# EAGLE board TelemetryECU rev1 Panel (EAGLE 9.5.0), part 1 of 3
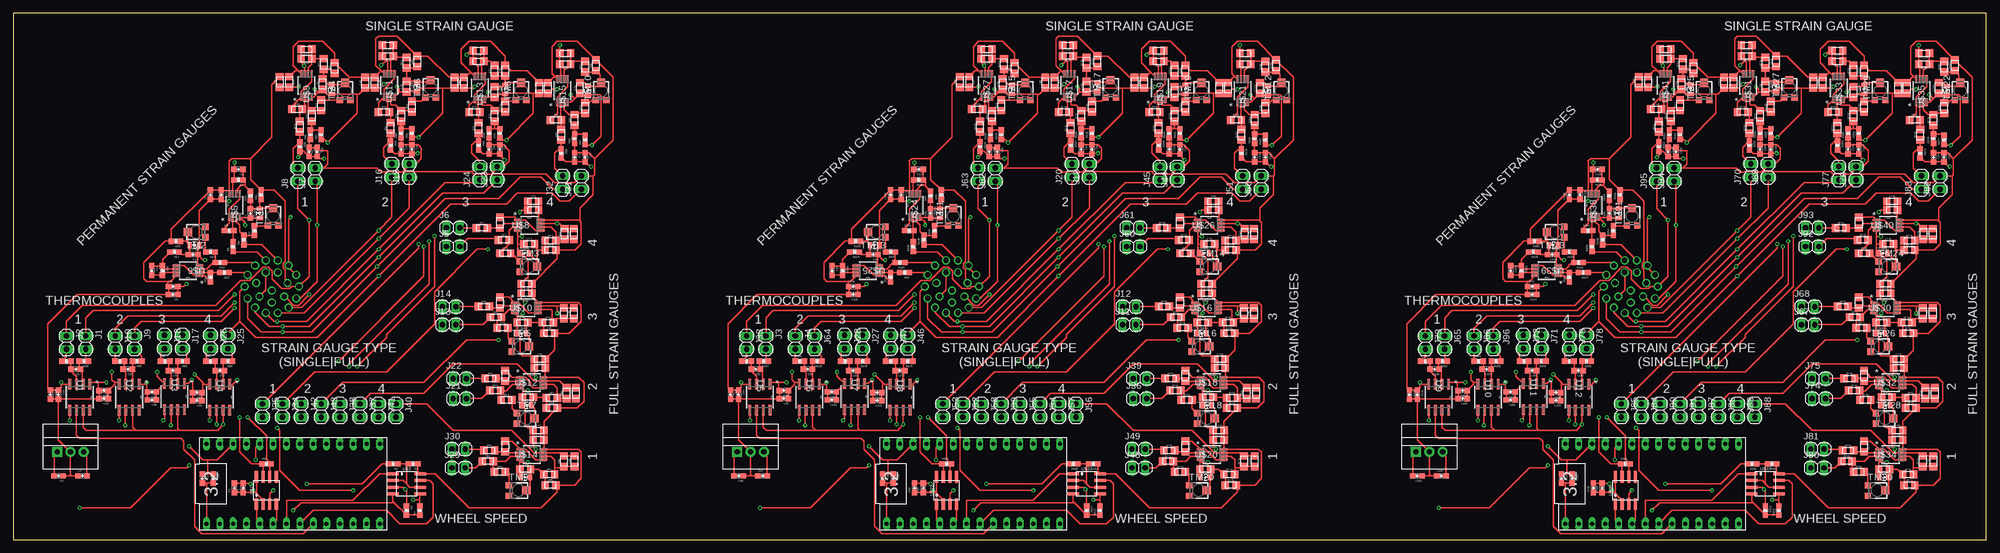
[diagram p0: board, top side]
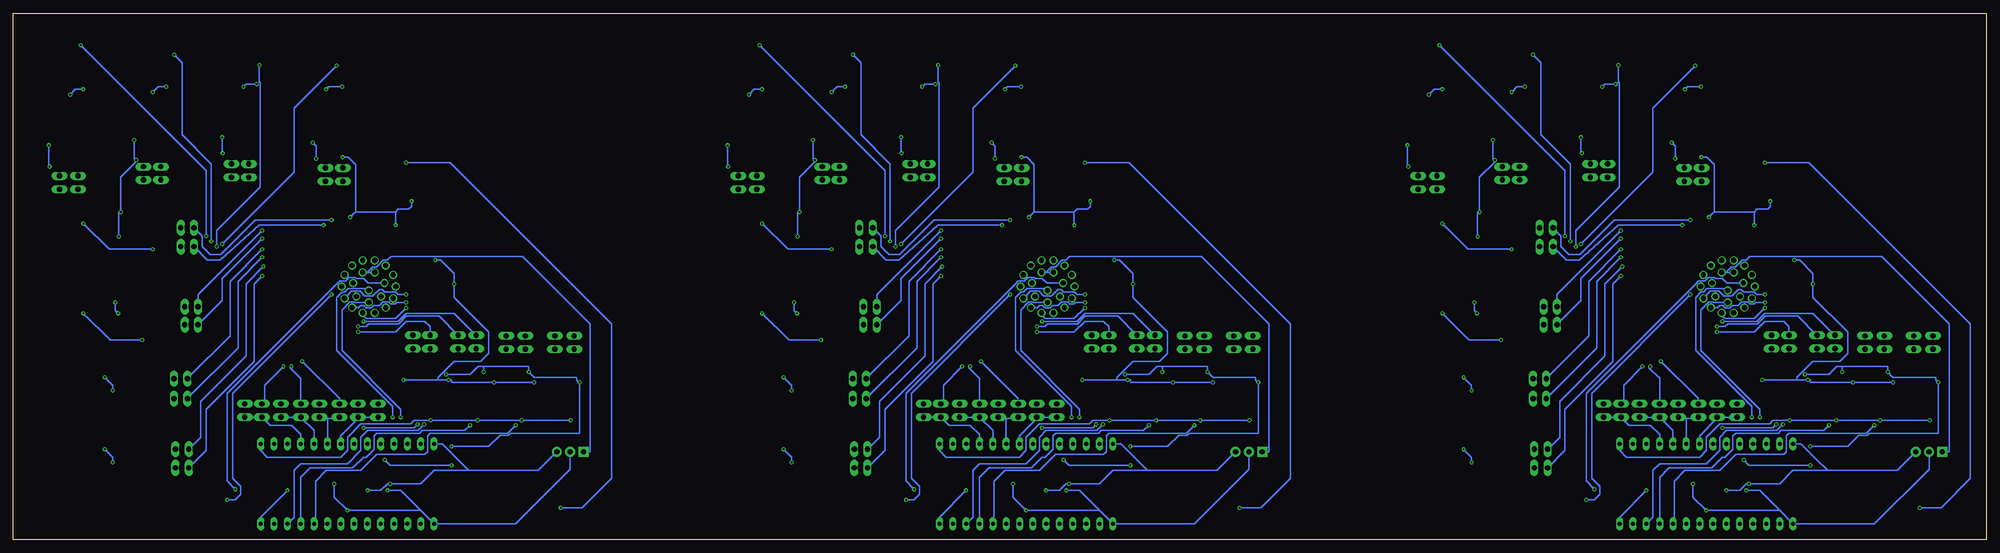
[diagram p1: board, bottom side, seen from below]

Size 375.84 x 100.38 mm. Coordinates in mm from the lower left corner, seen from the top.
Outline: 0,0 375.84,0 375.84,100.38 0,100.38 0,0
Copper layers (1*16): Top 0.035mm / dielectric 1.5mm / Bottom 0.035mm
Design rules "default": minimum track width 6mil, minimum drill 0.35mm, track to track 6mil, track to pad 6mil, pad to pad 6mil, via to via 6mil, smd to smd 6mil, copper to edge 40mil, drill to drill 6mil, minimum pad ring 10mil, minimum via ring 8mil, stop-mask expansion 4mil, vias tented up to drill 0mil, thermal gap 10mil

## Footprints (pad centres in the part's own frame; a part is rotated, then mirrored left to right if it is on the bottom)
0603-CAP = smd 1.1 x 1: 1 -0.85,0; 2 0.85,0
0805 = smd 1.4 x 1.5: 1 -1.025,0; 2 1.025,0
1X02 = drill 1.016 long: 1 -1.27,0; 2 1.27,0
0805_D = smd 0.8 x 1.2: A -0.9,0; C 0.9,0
0603-RES = smd 1.1 x 1: 1 -0.85,0; 2 0.85,0
OKI-78SR = drill 1 pad 1.88 square: 1 -2.54,0 | drill 1 pad 1.88: 2 0,0; 3 2.54,0
TC33X = smd 1.2 x 1.2: 1 -1,-1.825; 3 1,-1.825 | smd 1.5 x 1.6: 2 0,1.5
21-0041B_8 = smd 1.981 x 0.533: 1 -2.464,1.905; 2 -2.464,0.635; 3 -2.464,-0.635; 4 -2.464,-1.905; 5 2.464,-1.905; 6 2.464,-0.635; 7 2.464,0.635; 8 2.464,1.905
TEENSY_3.2_SIMPLE = drill 0.8 long: 3.3V 16.51,29.21; A0 16.51,3.81; A1 16.51,6.35; A2 16.51,8.89; A3 16.51,11.43; A4 16.51,13.97; A5 16.51,16.51; A6 16.51,19.05; A7 16.51,21.59; A8 16.51,24.13; A9 16.51,26.67; AGND 16.51,31.75; D0(RX1) 1.27,31.75; D1(TX1) 1.27,29.21; D2 1.27,26.67; D3(CANTX) 1.27,24.13; D4(CANRX) 1.27,21.59; D5 1.27,19.05; D6 1.27,16.51; D7(RX3) 1.27,13.97; D8(TX3) 1.27,11.43; D9(RX2) 1.27,8.89; D10(TX2) 1.27,6.35; D11 1.27,3.81; D12 1.27,1.27; D13 16.51,1.27; GND 1.27,34.29; VIN 16.51,34.29
SOIC-08 = smd 0.6 x 2.2: 1 -1.905,-2.6; 2 -0.635,-2.6; 3 0.635,-2.6; 4 1.905,-2.6; 5 1.905,2.6; 6 0.635,2.6; 7 -0.635,2.6; 8 -1.905,2.6
AUTOSPORT_12-35 = drill 1: P$1 1.143,5.004; P$2 3.2,4.013; P$3 4.623,2.235; P$4 5.156,0; P$5 4.623,-2.235; P$6 3.2,-4.013; P$7 1.143,-5.004; P$8 -1.143,-5.004; P$9 -3.2,-4.013; P$10 -4.623,-2.235; P$11 -5.156,0; P$12 -3.2,4.013; P$13 -1.143,5.004; P$14 1.143,2.718; P$15 2.972,0.66; P$16 2.362,-1.905; P$17 -2.362,-1.905; P$18 -2.972,0.66; P$19 -1.143,2.718; P$20 0,-0.762; P$21 0,-3.048; P$22 -4.623,2.235
MSOP-8_MS = smd 1.397 x 0.432: 1 -2.21,0.975; 2 -2.21,0.325; 3 -2.21,-0.325; 4 -2.21,-0.975; 5 2.21,-0.975; 6 2.21,-0.325; 7 2.21,0.325; 8 2.21,0.975

## Placement (x,y rotation side)
C1  1 uF  [0603-CAP]  43.81,9.91 90 top
C2  .1 uF  [0603-CAP]  42.16,9.91 90 top
C3  10uF  [0603-CAP]  8.64,12.19 180 top
C4  10uF  [0603-CAP]  13.21,12.19 0 top
C5  0.1uF  [0603-CAP]  30.48,46.74 180 top
C6  0.01uF  [0603-CAP]  42.93,70.61 180 top
C7  0.1uF  [0603-CAP]  45.21,62.23 90 top
C8  1uF  [0603-CAP]  30.48,48.26 0 top
C9  0.1uF  [0603-CAP]  37.59,65.79 90 top
C10  0.01uF  [0603-CAP]  26.42,51.31 270 top
C11  0.1uF  [0603-CAP]  34.29,54.36 180 top
C12  1uF  [0603-CAP]  39.62,65.79 270 top
C13  1uF  [0603-CAP]  38.1,11.68 270 top
C14  .1uF  [0603-CAP]  36.07,11.68 270 top
C15  1 uF  [0603-CAP]  173.35,9.91 90 top
C16  0.01uF  [0603-CAP]  155.96,51.31 270 top
C17  10nF  [0603-CAP]  11.94,32.51 180 top
C18  0.1uF  [0603-CAP]  7.11,27.69 270 top
C19  1uF  [0603-CAP]  8.64,27.69 270 top
C20  0.1uF  [0603-CAP]  163.83,54.36 180 top
C21  1uF  [0603-CAP]  169.16,65.79 270 top
C22  0.1uF  [0805]  99.06,62.87 0 top
C23  0.01uF  [0805]  106.81,58.29 90 top
C24  0.1uF  [0805]  98.3,56.39 0 top
C25  1uF  [0805]  99.06,64.52 0 top
C26  0.1uF  [0603-CAP]  57.91,73.91 270 top
C27  1uF  [0603-CAP]  56.39,73.91 270 top
C28  0.1uF  [0805]  50.8,87.25 90 top
C29  0.01uF  [0805]  55.88,93.47 180 top
C30  0.1uF  [0805]  58.93,86.87 90 top
C31  1uF  [0805]  52.58,87.25 270 top
C32  10nF  [0603-CAP]  21.84,32.51 180 top
C33  0.1uF  [0603-CAP]  17.27,28.45 180 top
C34  1uF  [0603-CAP]  17.27,26.92 180 top
C35  1uF  [0603-CAP]  167.64,11.68 270 top
C36  .1uF  [0603-CAP]  165.61,11.68 270 top
C37  0.1uF  [0805]  97.79,48.77 0 top
C38  0.01uF  [0805]  106.81,43.18 90 top
C39  0.1uF  [0805]  97.03,41.4 0 top
C40  1uF  [0805]  97.79,46.99 0 top
C41  0.1uF  [0603-CAP]  75.95,74.42 270 top
C42  1uF  [0603-CAP]  73.91,74.42 270 top
C43  0.1uF  [0805]  67.06,87.12 90 top
C44  0.01uF  [0805]  71.37,94.23 180 top
C45  0.1uF  [0805]  74.93,86.36 90 top
C46  1uF  [0805]  68.83,87.12 270 top
C47  10nF  [0603-CAP]  30.48,32.26 180 top
C48  0.1uF  [0603-CAP]  26.42,26.67 180 top
C49  1uF  [0603-CAP]  26.42,28.19 180 top
C50  10nF  [0603-CAP]  141.48,32.51 180 top
C51  0.1uF  [0603-CAP]  136.65,27.69 270 top
C52  0.1uF  [0805]  100.33,34.42 0 top
C53  0.01uF  [0805]  107.19,27.94 90 top
C54  0.1uF  [0805]  98.04,27.18 0 top
C55  1uF  [0805]  100.33,32.77 0 top
C56  0.1uF  [0603-CAP]  90.68,74.42 270 top
C57  1uF  [0603-CAP]  92.71,74.42 270 top
C58  0.1uF  [0805]  85.85,87.12 90 top
C59  0.01uF  [0805]  88.65,93.22 180 top
C60  0.1uF  [0805]  91.69,85.34 90 top
C61  1uF  [0805]  84.07,87.12 270 top
C62  10nF  [0603-CAP]  39.37,32.26 180 top
C63  0.1uF  [0603-CAP]  35.05,26.54 180 top
C64  1uF  [0603-CAP]  35.05,28.07 180 top
C65  1uF  [0603-CAP]  138.18,27.69 270 top
C66  .1 uF  [0603-CAP]  171.7,9.91 90 top
C67  0.1uF  [0805]  100.08,20.83 0 top
C68  0.01uF  [0805]  106.93,14.99 90 top
C69  0.1uF  [0805]  97.54,13.46 0 top
C70  1uF  [0805]  100.08,19.05 0 top
C71  0.1uF  [0603-CAP]  108.97,72.9 270 top
C72  1uF  [0603-CAP]  106.93,72.9 270 top
C73  0.1uF  [0805]  101.85,86.11 90 top
C74  0.01uF  [0805]  105.16,92.71 180 top
C75  0.1uF  [0805]  107.95,86.11 90 top
C76  1uF  [0805]  100.2,86.11 270 top
C77  0.1uF  [0805]  228.6,62.87 0 top
C78  0.01uF  [0805]  236.35,58.29 90 top
C79  0.1uF  [0805]  227.84,56.39 0 top
C80  1uF  [0805]  228.6,64.52 0 top
C81  0.1uF  [0603-CAP]  187.45,73.91 270 top
C82  1uF  [0603-CAP]  185.93,73.91 270 top
C83  0.1uF  [0805]  180.34,87.25 90 top
C84  0.01uF  [0805]  185.42,93.47 180 top
C85  10uF  [0603-CAP]  138.18,12.19 180 top
C86  0.1uF  [0805]  188.47,86.87 90 top
C87  1uF  [0805]  182.12,87.25 270 top
C88  10nF  [0603-CAP]  151.38,32.51 180 top
C89  0.1uF  [0603-CAP]  146.81,28.45 180 top
C90  1uF  [0603-CAP]  146.81,26.92 180 top
C91  0.1uF  [0805]  227.33,48.77 0 top
C92  0.01uF  [0805]  236.35,43.18 90 top
C93  0.1uF  [0805]  226.57,41.4 0 top
C94  10uF  [0603-CAP]  142.75,12.19 0 top
C95  1uF  [0805]  227.33,46.99 0 top
C96  0.1uF  [0603-CAP]  205.49,74.42 270 top
C97  1uF  [0603-CAP]  203.45,74.42 270 top
C98  0.1uF  [0805]  196.6,87.12 90 top
C99  0.01uF  [0805]  200.91,94.23 180 top
C100  0.1uF  [0805]  204.47,86.36 90 top
C101  1uF  [0805]  198.37,87.12 270 top
C102  10nF  [0603-CAP]  160.02,32.26 180 top
C103  0.1uF  [0603-CAP]  155.96,26.67 180 top
C104  1uF  [0603-CAP]  155.96,28.19 180 top
C105  0.1uF  [0603-CAP]  160.02,46.74 180 top
C106  0.1uF  [0805]  229.87,34.42 0 top
C107  0.01uF  [0805]  236.73,27.94 90 top
C108  0.1uF  [0805]  227.58,27.18 0 top
C109  1uF  [0805]  229.87,32.77 0 top
C110  0.1uF  [0603-CAP]  220.22,74.42 270 top
C111  1uF  [0603-CAP]  222.25,74.42 270 top
C112  0.1uF  [0805]  215.39,87.12 90 top
C113  0.01uF  [0805]  218.19,93.22 180 top
C114  0.01uF  [0603-CAP]  172.47,70.61 180 top
C115  0.1uF  [0805]  221.23,85.34 90 top
C116  1uF  [0805]  213.61,87.12 270 top
C117  10nF  [0603-CAP]  168.91,32.26 180 top
C118  0.1uF  [0603-CAP]  164.59,26.54 180 top
C119  1uF  [0603-CAP]  164.59,28.07 180 top
C120  0.1uF  [0805]  229.62,20.83 0 top
C121  0.01uF  [0805]  236.47,14.99 90 top
C122  0.1uF  [0805]  227.08,13.46 0 top
C123  0.1uF  [0603-CAP]  174.75,62.23 90 top
C124  1uF  [0805]  229.62,19.05 0 top
C125  0.1uF  [0603-CAP]  238.51,72.9 270 top
C126  1uF  [0603-CAP]  236.47,72.9 270 top
C127  0.1uF  [0805]  231.39,86.11 90 top
C128  0.01uF  [0805]  234.7,92.71 180 top
C129  0.1uF  [0805]  237.49,86.11 90 top
C130  1uF  [0805]  229.74,86.11 270 top
C131  1uF  [0603-CAP]  160.02,48.26 0 top
C132  0.1uF  [0603-CAP]  167.13,65.79 90 top
C133  1 uF  [0603-CAP]  302.64,9.91 90 top
C134  0.01uF  [0603-CAP]  285.24,51.31 270 top
C135  0.1uF  [0603-CAP]  293.12,54.36 180 top
C136  1uF  [0603-CAP]  298.45,65.79 270 top
C137  1uF  [0603-CAP]  296.93,11.68 270 top
C138  .1uF  [0603-CAP]  294.89,11.68 270 top
C139  10nF  [0603-CAP]  270.76,32.51 180 top
C140  0.1uF  [0603-CAP]  265.94,27.69 270 top
C141  1uF  [0603-CAP]  267.46,27.69 270 top
C142  .1 uF  [0603-CAP]  300.99,9.91 90 top
C143  0.1uF  [0805]  357.89,62.87 0 top
C144  0.01uF  [0805]  365.63,58.29 90 top
C145  0.1uF  [0805]  357.12,56.39 0 top
C146  1uF  [0805]  357.89,64.52 0 top
C147  0.1uF  [0603-CAP]  316.74,73.91 270 top
C148  1uF  [0603-CAP]  315.21,73.91 270 top
C149  0.1uF  [0805]  309.63,87.25 90 top
C150  0.01uF  [0805]  314.71,93.47 180 top
C151  10uF  [0603-CAP]  267.46,12.19 180 top
C152  0.1uF  [0805]  317.75,86.87 90 top
C153  1uF  [0805]  311.4,87.25 270 top
C154  10nF  [0603-CAP]  280.67,32.51 180 top
C155  0.1uF  [0603-CAP]  276.1,28.45 180 top
C156  1uF  [0603-CAP]  276.1,26.92 180 top
C157  0.1uF  [0805]  356.62,48.77 0 top
C158  0.01uF  [0805]  365.63,43.18 90 top
C159  0.1uF  [0805]  355.85,41.4 0 top
C160  10uF  [0603-CAP]  272.03,12.19 0 top
C161  1uF  [0805]  356.62,46.99 0 top
C162  0.1uF  [0603-CAP]  334.77,74.42 270 top
C163  1uF  [0603-CAP]  332.74,74.42 270 top
C164  0.1uF  [0805]  325.88,87.12 90 top
C165  0.01uF  [0805]  330.2,94.23 180 top
C166  0.1uF  [0805]  333.76,86.36 90 top
C167  1uF  [0805]  327.66,87.12 270 top
C168  10nF  [0603-CAP]  289.31,32.26 180 top
C169  0.1uF  [0603-CAP]  285.24,26.67 180 top
C170  1uF  [0603-CAP]  285.24,28.19 180 top
C171  0.1uF  [0603-CAP]  289.31,46.74 180 top
C172  0.1uF  [0805]  359.16,34.42 0 top
C173  0.01uF  [0805]  366.01,27.94 90 top
C174  0.1uF  [0805]  356.87,27.18 0 top
C175  1uF  [0805]  359.16,32.77 0 top
C176  0.1uF  [0603-CAP]  349.5,74.42 270 top
C177  1uF  [0603-CAP]  351.54,74.42 270 top
C178  0.1uF  [0805]  344.68,87.12 90 top
C179  0.01uF  [0805]  347.47,93.22 180 top
C180  0.01uF  [0603-CAP]  301.75,70.61 180 top
C181  0.1uF  [0805]  350.52,85.34 90 top
C182  1uF  [0805]  342.9,87.12 270 top
C183  10nF  [0603-CAP]  298.2,32.26 180 top
C184  0.1uF  [0603-CAP]  293.88,26.54 180 top
C185  1uF  [0603-CAP]  293.88,28.07 180 top
C186  0.1uF  [0805]  358.9,20.83 0 top
C187  0.01uF  [0805]  365.76,14.99 90 top
C188  0.1uF  [0805]  356.36,13.46 0 top
C189  0.1uF  [0603-CAP]  304.04,62.23 90 top
C190  1uF  [0805]  358.9,19.05 0 top
C191  0.1uF  [0603-CAP]  367.79,72.9 270 top
C192  1uF  [0603-CAP]  365.76,72.9 270 top
C193  0.1uF  [0805]  360.68,86.11 90 top
C194  0.01uF  [0805]  363.98,92.71 180 top
C195  0.1uF  [0805]  366.78,86.11 90 top
C196  1uF  [0805]  359.03,86.11 270 top
C197  1uF  [0603-CAP]  289.31,48.26 0 top
C198  0.1uF  [0603-CAP]  296.42,65.79 90 top
J1  JUMPER.1  [1X02]  13.84,37.59 270 top
J2  JUMPER.1  [1X02]  10.16,37.59 270 top
J3  JUMPER.1  [1X02]  143.38,37.59 270 top
J4  JUMPER.1  [1X02]  148.97,37.59 270 top
J5  JUMPER.1  [1X02]  83.82,55.88 0 top
J6  JUMPER.1  [1X02]  83.82,59.44 0 top
J7  JUMPER.1  [1X02]  57.53,69.6 90 top
J8  JUMPER.1  [1X02]  54.23,69.6 90 top
J9  JUMPER.1  [1X02]  23.11,37.59 270 top
J10  JUMPER.1  [1X02]  19.43,37.59 270 top
J11  JUMPER.1  [1X02]  212.6,41.02 0 top
J12  JUMPER.1  [1X02]  212.6,44.45 0 top
J13  JUMPER.1  [1X02]  83.06,41.02 0 top
J14  JUMPER.1  [1X02]  83.06,44.45 0 top
J15  JUMPER.1  [1X02]  75.44,70.36 90 top
J16  JUMPER.1  [1X02]  72.14,70.36 90 top
J17  JUMPER.1  [1X02]  32.26,37.72 270 top
J18  JUMPER.1  [1X02]  28.83,37.72 270 top
J19  JUMPER.1  [1X02]  204.98,70.36 90 top
J20  JUMPER.1  [1X02]  201.68,70.36 90 top
J21  JUMPER.1  [1X02]  85.09,26.92 0 top
J22  JUMPER.1  [1X02]  85.09,30.73 0 top
J23  JUMPER.1  [1X02]  92.2,69.85 90 top
J24  JUMPER.1  [1X02]  88.9,69.85 90 top
J25  JUMPER.1  [1X02]  40.89,37.72 270 top
J26  JUMPER.1  [1X02]  37.59,37.72 270 top
J27  JUMPER.1  [1X02]  161.8,37.72 270 top
J28  JUMPER.1  [1X02]  158.37,37.72 270 top
J29  JUMPER.1  [1X02]  84.84,13.72 0 top
J30  JUMPER.1  [1X02]  84.84,17.27 0 top
J31  JUMPER.1  [1X02]  108.2,68.07 90 top
J32  JUMPER.1  [1X02]  104.65,68.07 90 top
J33  JUMPER.1  [1X02]  139.7,37.59 270 top
J34  JUMPER.1  [1X02]  51.31,24.64 270 top
J35  JUMPER.1  [1X02]  47.5,24.64 270 top
J36  JUMPER.1  [1X02]  214.63,26.92 0 top
J37  JUMPER.1  [1X02]  66.04,24.64 270 top
J38  JUMPER.1  [1X02]  62.23,24.64 270 top
J39  JUMPER.1  [1X02]  214.63,30.73 0 top
J40  JUMPER.1  [1X02]  72.9,24.64 270 top
J41  JUMPER.1  [1X02]  69.6,24.64 270 top
J42  JUMPER.1  [1X02]  54.86,24.64 270 top
J43  JUMPER.1  [1X02]  58.67,24.64 270 top
J44  JUMPER.1  [1X02]  221.74,69.85 90 top
J45  JUMPER.1  [1X02]  218.44,69.85 90 top
J46  JUMPER.1  [1X02]  170.43,37.72 270 top
J47  JUMPER.1  [1X02]  167.13,37.72 270 top
J48  JUMPER.1  [1X02]  214.38,13.72 0 top
J49  JUMPER.1  [1X02]  214.38,17.27 0 top
J50  JUMPER.1  [1X02]  237.74,68.07 90 top
J51  JUMPER.1  [1X02]  234.19,68.07 90 top
J52  JUMPER.1  [1X02]  180.85,24.64 270 top
J53  JUMPER.1  [1X02]  177.04,24.64 270 top
J54  JUMPER.1  [1X02]  195.58,24.64 270 top
J55  JUMPER.1  [1X02]  191.77,24.64 270 top
J56  JUMPER.1  [1X02]  202.44,24.64 270 top
J57  JUMPER.1  [1X02]  199.14,24.64 270 top
J58  JUMPER.1  [1X02]  184.4,24.64 270 top
J59  JUMPER.1  [1X02]  188.21,24.64 270 top
J60  JUMPER.1  [1X02]  213.36,55.88 0 top
J61  JUMPER.1  [1X02]  213.36,59.44 0 top
J62  JUMPER.1  [1X02]  187.07,69.6 90 top
J63  JUMPER.1  [1X02]  183.77,69.6 90 top
J64  JUMPER.1  [1X02]  152.65,37.59 270 top
J65  JUMPER.1  [1X02]  272.67,37.59 270 top
J66  JUMPER.1  [1X02]  278.26,37.59 270 top
J67  JUMPER.1  [1X02]  341.88,41.02 0 top
J68  JUMPER.1  [1X02]  341.88,44.45 0 top
J69  JUMPER.1  [1X02]  334.26,70.36 90 top
J70  JUMPER.1  [1X02]  330.96,70.36 90 top
J71  JUMPER.1  [1X02]  291.08,37.72 270 top
J72  JUMPER.1  [1X02]  287.65,37.72 270 top
J73  JUMPER.1  [1X02]  268.99,37.59 270 top
J74  JUMPER.1  [1X02]  343.92,26.92 0 top
J75  JUMPER.1  [1X02]  343.92,30.73 0 top
J76  JUMPER.1  [1X02]  351.03,69.85 90 top
J77  JUMPER.1  [1X02]  347.73,69.85 90 top
J78  JUMPER.1  [1X02]  299.72,37.72 270 top
J79  JUMPER.1  [1X02]  296.42,37.72 270 top
J80  JUMPER.1  [1X02]  343.66,13.72 0 top
J81  JUMPER.1  [1X02]  343.66,17.27 0 top
J82  JUMPER.1  [1X02]  367.03,68.07 90 top
J83  JUMPER.1  [1X02]  363.47,68.07 90 top
J84  JUMPER.1  [1X02]  310.13,24.64 270 top
J85  JUMPER.1  [1X02]  306.32,24.64 270 top
J86  JUMPER.1  [1X02]  324.87,24.64 270 top
J87  JUMPER.1  [1X02]  321.06,24.64 270 top
J88  JUMPER.1  [1X02]  331.72,24.64 270 top
J89  JUMPER.1  [1X02]  328.42,24.64 270 top
J90  JUMPER.1  [1X02]  313.69,24.64 270 top
J91  JUMPER.1  [1X02]  317.5,24.64 270 top
J92  JUMPER.1  [1X02]  342.65,55.88 0 top
J93  JUMPER.1  [1X02]  342.65,59.44 0 top
J94  JUMPER.1  [1X02]  316.36,69.6 90 top
J95  JUMPER.1  [1X02]  313.06,69.6 90 top
J96  JUMPER.1  [1X02]  281.94,37.59 270 top
LT1790B  1.25V  [0805_D]  46.99,62.23 90 top
LT1790B1  1.25V  [0805_D]  34.54,56.13 180 top
LT1790B2  1.25V  [0805_D]  97.28,54.61 0 top
LT1790B3  1.25V  [0805_D]  60.71,85.85 90 top
LT1790B4  1.25V  [0805_D]  96.77,39.37 0 top
LT1790B5  1.25V  [0805_D]  76.96,86.36 90 top
LT1790B6  1.25V  [0805_D]  97.79,25.65 0 top
LT1790B7  1.25V  [0805_D]  93.73,85.85 90 top
LT1790B8  1.25V  [0805_D]  97.54,11.94 0 top
LT1790B9  1.25V  [0805_D]  109.47,85.6 90 top
LT1790B10  1.25V  [0805_D]  176.53,62.23 90 top
LT1790B11  1.25V  [0805_D]  164.08,56.13 180 top
LT1790B12  1.25V  [0805_D]  226.82,54.61 0 top
LT1790B13  1.25V  [0805_D]  190.25,85.85 90 top
LT1790B14  1.25V  [0805_D]  226.31,39.37 0 top
LT1790B15  1.25V  [0805_D]  206.5,86.36 90 top
LT1790B16  1.25V  [0805_D]  227.33,25.65 0 top
LT1790B17  1.25V  [0805_D]  223.27,85.85 90 top
LT1790B18  1.25V  [0805_D]  227.08,11.94 0 top
LT1790B19  1.25V  [0805_D]  239.01,85.6 90 top
LT1790B20  1.25V  [0805_D]  305.82,62.23 90 top
LT1790B21  1.25V  [0805_D]  293.37,56.13 180 top
LT1790B22  1.25V  [0805_D]  356.11,54.61 0 top
LT1790B23  1.25V  [0805_D]  319.53,85.85 90 top
LT1790B24  1.25V  [0805_D]  355.6,39.37 0 top
LT1790B25  1.25V  [0805_D]  335.79,86.36 90 top
LT1790B26  1.25V  [0805_D]  356.62,25.65 0 top
LT1790B27  1.25V  [0805_D]  352.55,85.85 90 top
LT1790B28  1.25V  [0805_D]  356.36,11.94 0 top
LT1790B29  1.25V  [0805_D]  368.3,85.6 90 top
R1  1k  [0603-RES]  76.2,14.48 180 top
R2  1k  [0603-RES]  72.39,14.48 180 top
R3  150  [0603-RES]  74.93,5.59 270 top
R4  150  [0603-RES]  77.47,5.59 90 top
R5  10M  [0603-RES]  41.91,55.88 90 top
R6  10M  [0603-RES]  43.94,57.15 90 top
R7  9.76M  [0603-RES]  45.97,58.93 90 top
R8  10M  [0603-RES]  41.15,58.93 0 top
R9  100k  [0603-RES]  42.93,68.58 180 top
R10  100  [0603-RES]  45.21,65.53 90 top
R11  10k  [0603-RES]  47.24,65.79 90 top
R12  10M  [0603-RES]  40.26,50.93 180 top
R13  10M  [0603-RES]  39.37,52.83 180 top
R14  9.76M  [0603-RES]  37.59,54.86 180 top
R15  10M  [0603-RES]  37.59,50.04 90 top
R16  100k  [0603-RES]  28.45,51.31 270 top
R17  100  [0603-RES]  30.73,54.86 180 top
R18  10k  [0603-RES]  30.99,56.9 180 top
R19  1k  [0603-RES]  205.74,14.48 180 top
R20  0  [0603-RES]  13.46,34.04 180 top
R21  0  [0603-RES]  10.16,34.04 0 top
R22  10M  [0805]  89.28,59.44 0 top
R23  10M  [0805]  93.47,57.15 0 top
R24  9.76M  [0805]  93.73,54.61 0 top
R25  10M  [0805]  92.71,60.45 270 top
R26  100k  [0805]  105.03,58.29 90 top
R27  100  [0805]  102.36,57.02 0 top
R28  10k  [0805]  102.36,55.24 0 top
R29  10M  [0805]  54.61,78.74 90 top
R30  [0603-RES]  54.61,74.93 270 top
R31  [0603-RES]  56.64,77.22 90 top
R32  [0603-RES]  58.67,77.22 90 top
R33  10M  [0805]  56.9,80.77 90 top
R34  9.76M  [0805]  58.67,82.8 90 top
R35  10M  [0805]  54.1,82.04 0 top
R36  100k  [0805]  55.88,91.69 180 top
R37  100  [0805]  59.18,90.68 90 top
R38  10k  [0805]  61.21,89.92 90 top
R39  220  [0603-RES]  48.26,14.48 0 top
R40  0  [0603-RES]  23.62,34.04 180 top
R41  0  [0603-RES]  20.32,34.04 0 top
R42  10M  [0805]  89.66,44.45 0 top
R43  10M  [0805]  91.95,42.42 0 top
R44  9.76M  [0805]  93.22,40.39 0 top
R45  10M  [0805]  92.71,45.21 270 top
R46  100k  [0805]  104.9,43.18 90 top
R47  100  [0805]  101.85,41.4 0 top
R48  10k  [0805]  102.11,39.37 0 top
R49  [0603-RES]  71.88,75.18 270 top
R50  [0603-RES]  73.91,77.47 90 top
R51  [0603-RES]  75.95,77.47 90 top
R52  10M  [0805]  71.88,78.49 90 top
R53  10M  [0805]  73.91,80.77 90 top
R54  9.76M  [0805]  75.95,82.55 90 top
R55  10M  [0805]  70.61,81.53 0 top
R56  100k  [0805]  71.37,92.2 180 top
R57  100  [0805]  74.93,90.93 90 top
R58  10k  [0805]  76.96,91.19 90 top
R59  100  [0603-RES]  174.75,65.53 90 top
R60  0  [0603-RES]  32.26,34.04 180 top
R61  0  [0603-RES]  28.96,34.04 0 top
R62  10M  [0805]  90.93,30.73 0 top
R63  10M  [0805]  91.82,28.45 0 top
R64  9.76M  [0805]  93.98,26.67 0 top
R65  10M  [0805]  93.73,31.24 270 top
R66  100k  [0805]  105.41,27.94 90 top
R67  100  [0805]  102.62,27.05 0 top
R68  10k  [0805]  102.62,25.15 0 top
R69  [0603-RES]  88.65,75.18 270 top
R70  [0603-RES]  90.68,77.47 90 top
R71  [0603-RES]  92.71,77.47 90 top
R72  10M  [0805]  88.65,78.49 90 top
R73  10M  [0805]  91.69,80.77 90 top
R74  9.76M  [0805]  93.73,82.55 90 top
R75  10M  [0805]  87.88,81.53 0 top
R76  100k  [0805]  88.65,91.19 180 top
R77  100  [0805]  91.69,89.41 90 top
R78  10k  [0805]  93.73,89.41 90 top
R79  10k  [0603-RES]  176.78,65.79 90 top
R80  0  [0603-RES]  40.89,34.04 180 top
R81  0  [0603-RES]  37.59,34.04 0 top
R82  10M  [0805]  90.68,17.02 0 top
R83  10M  [0805]  90.42,14.99 0 top
R84  9.76M  [0805]  92.71,12.95 0 top
R85  10M  [0805]  93.73,17.78 270 top
R86  100k  [0805]  104.9,14.99 90 top
R87  100  [0805]  102.11,12.45 0 top
R88  10k  [0805]  102.36,10.41 0 top
R89  [0603-RES]  104.39,73.66 270 top
R90  [0603-RES]  106.93,76.45 90 top
R91  [0603-RES]  108.97,76.2 90 top
R92  10M  [0805]  104.39,77.22 90 top
R93  10M  [0805]  106.93,80.01 90 top
R94  9.76M  [0805]  108.97,82.3 90 top
R95  10M  [0805]  103.38,80.01 0 top
R96  100k  [0805]  105.16,90.68 180 top
R97  100  [0805]  108.97,90.17 90 top
R98  10k  [0805]  111,90.42 90 top
R99  10M  [0603-RES]  169.8,50.93 180 top
R100  10M  [0603-RES]  168.91,52.83 180 top
R101  9.76M  [0603-RES]  167.13,54.86 180 top
R102  10M  [0603-RES]  167.13,50.04 90 top
R103  100k  [0603-RES]  157.99,51.31 270 top
R104  100  [0603-RES]  160.27,54.86 180 top
R105  10k  [0603-RES]  160.53,56.9 180 top
R106  1k  [0603-RES]  201.93,14.48 180 top
R107  0  [0603-RES]  143,34.04 180 top
R108  0  [0603-RES]  139.7,34.04 0 top
R109  10M  [0805]  218.82,59.44 0 top
R110  10M  [0805]  223.01,57.15 0 top
R111  9.76M  [0805]  223.27,54.61 0 top
R112  10M  [0805]  222.25,60.45 270 top
R113  100k  [0805]  234.57,58.29 90 top
R114  100  [0805]  231.9,57.02 0 top
R115  10k  [0805]  231.9,55.24 0 top
R116  10M  [0805]  184.15,78.74 90 top
R117  150  [0603-RES]  204.47,5.59 270 top
R118  [0603-RES]  184.15,74.93 270 top
R119  [0603-RES]  186.18,77.22 90 top
R120  [0603-RES]  188.21,77.22 90 top
R121  10M  [0805]  186.44,80.77 90 top
R122  9.76M  [0805]  188.21,82.8 90 top
R123  10M  [0805]  183.64,82.04 0 top
R124  100k  [0805]  185.42,91.69 180 top
R125  100  [0805]  188.72,90.68 90 top
R126  10k  [0805]  190.75,89.92 90 top
R127  150  [0603-RES]  207.01,5.59 90 top
R128  0  [0603-RES]  153.16,34.04 180 top
R129  0  [0603-RES]  149.86,34.04 0 top
R130  10M  [0805]  219.2,44.45 0 top
R131  10M  [0805]  221.49,42.42 0 top
R132  9.76M  [0805]  222.76,40.39 0 top
R133  10M  [0805]  222.25,45.21 270 top
R134  100k  [0805]  234.44,43.18 90 top
R135  100  [0805]  231.39,41.4 0 top
R136  10k  [0805]  231.65,39.37 0 top
R137  [0603-RES]  201.42,75.18 270 top
R138  10M  [0603-RES]  171.45,55.88 90 top
R139  [0603-RES]  203.45,77.47 90 top
R140  [0603-RES]  205.49,77.47 90 top
R141  10M  [0805]  201.42,78.49 90 top
R142  10M  [0805]  203.45,80.77 90 top
R143  9.76M  [0805]  205.49,82.55 90 top
R144  10M  [0805]  200.15,81.53 0 top
R145  100k  [0805]  200.91,92.2 180 top
R146  100  [0805]  204.47,90.93 90 top
R147  10k  [0805]  206.5,91.19 90 top
R148  10M  [0603-RES]  173.48,57.15 90 top
R149  0  [0603-RES]  161.8,34.04 180 top
R150  0  [0603-RES]  158.5,34.04 0 top
R151  10M  [0805]  220.47,30.73 0 top
R152  10M  [0805]  221.36,28.45 0 top
R153  9.76M  [0805]  223.52,26.67 0 top
R154  10M  [0805]  223.27,31.24 270 top
R155  100k  [0805]  234.95,27.94 90 top
R156  100  [0805]  232.16,27.05 0 top
R157  10k  [0805]  232.16,25.15 0 top
R158  [0603-RES]  218.19,75.18 270 top
R159  9.76M  [0603-RES]  175.51,58.93 90 top
R160  [0603-RES]  220.22,77.47 90 top
R161  [0603-RES]  222.25,77.47 90 top
R162  10M  [0805]  218.19,78.49 90 top
R163  10M  [0805]  221.23,80.77 90 top
R164  9.76M  [0805]  223.27,82.55 90 top
R165  10M  [0805]  217.42,81.53 0 top
R166  100k  [0805]  218.19,91.19 180 top
R167  100  [0805]  221.23,89.41 90 top
R168  10k  [0805]  223.27,89.41 90 top
R169  10M  [0603-RES]  170.69,58.93 0 top
R170  0  [0603-RES]  170.43,34.04 180 top
R171  0  [0603-RES]  167.13,34.04 0 top
R172  10M  [0805]  220.22,17.02 0 top
R173  10M  [0805]  219.96,14.99 0 top
R174  9.76M  [0805]  222.25,12.95 0 top
R175  10M  [0805]  223.27,17.78 270 top
R176  100k  [0805]  234.44,14.99 90 top
R177  100  [0805]  231.65,12.45 0 top
R178  10k  [0805]  231.9,10.41 0 top
R179  [0603-RES]  233.93,73.66 270 top
R180  100k  [0603-RES]  172.47,68.58 180 top
R181  [0603-RES]  236.47,76.45 90 top
R182  [0603-RES]  238.51,76.2 90 top
R183  10M  [0805]  233.93,77.22 90 top
R184  10M  [0805]  236.47,80.01 90 top
R185  9.76M  [0805]  238.51,82.3 90 top
R186  10M  [0805]  232.92,80.01 0 top
R187  100k  [0805]  234.7,90.68 180 top
R188  100  [0805]  238.51,90.17 90 top
R189  10k  [0805]  240.54,90.42 90 top
R190  220  [0603-RES]  177.8,14.48 0 top
R191  1k  [0603-RES]  335.03,14.48 180 top
R192  100  [0603-RES]  304.04,65.53 90 top
R193  10k  [0603-RES]  306.07,65.79 90 top
R194  10M  [0603-RES]  299.08,50.93 180 top
R195  10M  [0603-RES]  298.2,52.83 180 top
R196  9.76M  [0603-RES]  296.42,54.86 180 top
R197  10M  [0603-RES]  296.42,50.04 90 top
R198  100k  [0603-RES]  287.27,51.31 270 top
R199  100  [0603-RES]  289.56,54.86 180 top
R200  10k  [0603-RES]  289.81,56.9 180 top
R201  1k  [0603-RES]  331.22,14.48 180 top
R202  0  [0603-RES]  272.29,34.04 180 top
R203  0  [0603-RES]  268.99,34.04 0 top
R204  10M  [0805]  348.11,59.44 0 top
R205  10M  [0805]  352.3,57.15 0 top
R206  9.76M  [0805]  352.55,54.61 0 top
R207  10M  [0805]  351.54,60.45 270 top
R208  100k  [0805]  363.86,58.29 90 top
R209  100  [0805]  361.19,57.02 0 top
R210  10k  [0805]  361.19,55.24 0 top
R211  10M  [0805]  313.44,78.74 90 top
R212  150  [0603-RES]  333.76,5.59 270 top
R213  [0603-RES]  313.44,74.93 270 top
R214  [0603-RES]  315.47,77.22 90 top
R215  [0603-RES]  317.5,77.22 90 top
R216  10M  [0805]  315.72,80.77 90 top
R217  9.76M  [0805]  317.5,82.8 90 top
R218  10M  [0805]  312.93,82.04 0 top
R219  100k  [0805]  314.71,91.69 180 top
R220  100  [0805]  318.01,90.68 90 top
R221  10k  [0805]  320.04,89.92 90 top
R222  150  [0603-RES]  336.3,5.59 90 top
R223  0  [0603-RES]  282.45,34.04 180 top
R224  0  [0603-RES]  279.15,34.04 0 top
R225  10M  [0805]  348.49,44.45 0 top
R226  10M  [0805]  350.77,42.42 0 top
R227  9.76M  [0805]  352.04,40.39 0 top
R228  10M  [0805]  351.54,45.21 270 top
R229  100k  [0805]  363.73,43.18 90 top
R230  100  [0805]  360.68,41.4 0 top
R231  10k  [0805]  360.93,39.37 0 top
R232  [0603-RES]  330.71,75.18 270 top
R233  10M  [0603-RES]  300.74,55.88 90 top
R234  [0603-RES]  332.74,77.47 90 top
R235  [0603-RES]  334.77,77.47 90 top
R236  10M  [0805]  330.71,78.49 90 top
R237  10M  [0805]  332.74,80.77 90 top
R238  9.76M  [0805]  334.77,82.55 90 top
R239  10M  [0805]  329.44,81.53 0 top
R240  100k  [0805]  330.2,92.2 180 top
R241  100  [0805]  333.76,90.93 90 top
R242  10k  [0805]  335.79,91.19 90 top
R243  10M  [0603-RES]  302.77,57.15 90 top
R244  0  [0603-RES]  291.08,34.04 180 top
R245  0  [0603-RES]  287.78,34.04 0 top
R246  10M  [0805]  349.76,30.73 0 top
R247  10M  [0805]  350.65,28.45 0 top
R248  9.76M  [0805]  352.81,26.67 0 top
R249  10M  [0805]  352.55,31.24 270 top
R250  100k  [0805]  364.24,27.94 90 top
R251  100  [0805]  361.44,27.05 0 top
R252  10k  [0805]  361.44,25.15 0 top
R253  [0603-RES]  347.47,75.18 270 top
R254  9.76M  [0603-RES]  304.8,58.93 90 top
R255  [0603-RES]  349.5,77.47 90 top
R256  [0603-RES]  351.54,77.47 90 top
R257  10M  [0805]  347.47,78.49 90 top
R258  10M  [0805]  350.52,80.77 90 top
R259  9.76M  [0805]  352.55,82.55 90 top
R260  10M  [0805]  346.71,81.53 0 top
R261  100k  [0805]  347.47,91.19 180 top
R262  100  [0805]  350.52,89.41 90 top
R263  10k  [0805]  352.55,89.41 90 top
R264  10M  [0603-RES]  299.97,58.93 0 top
R265  0  [0603-RES]  299.72,34.04 180 top
R266  0  [0603-RES]  296.42,34.04 0 top
R267  10M  [0805]  349.5,17.02 0 top
R268  10M  [0805]  349.25,14.99 0 top
R269  9.76M  [0805]  351.54,12.95 0 top
R270  10M  [0805]  352.55,17.78 270 top
R271  100k  [0805]  363.73,14.99 90 top
R272  100  [0805]  360.93,12.45 0 top
R273  10k  [0805]  361.19,10.41 0 top
R274  [0603-RES]  363.22,73.66 270 top
R275  100k  [0603-RES]  301.75,68.58 180 top
R276  [0603-RES]  365.76,76.45 90 top
R277  [0603-RES]  367.79,76.2 90 top
R278  10M  [0805]  363.22,77.22 90 top
R279  10M  [0805]  365.76,80.01 90 top
R280  9.76M  [0805]  367.79,82.3 90 top
R281  10M  [0805]  362.2,80.01 0 top
R282  100k  [0805]  363.98,90.68 180 top
R283  100  [0805]  367.79,90.17 90 top
R284  10k  [0805]  369.82,90.42 90 top
R285  220  [0603-RES]  307.09,14.48 0 top
REG  5V  [OKI-78SR]  10.92,16.76 0 top
REG1  5V  [OKI-78SR]  140.46,16.76 0 top
REG2  5V  [OKI-78SR]  269.75,16.76 0 top
TM1  500k  [TC33X]  49.53,61.72 0 top
TM2  500k  [TC33X]  34.8,58.67 90 top
TM3  500k  [TC33X]  98.3,52.07 270 top
TM4  500k  [TC33X]  63.25,85.6 0 top
TM5  500k  [TC33X]  96.77,36.83 270 top
TM6  500k  [TC33X]  79.5,86.11 0 top
TM7  500k  [TC33X]  97.79,23.11 270 top
TM8  500k  [TC33X]  96.77,85.6 0 top
TM9  500k  [TC33X]  96.27,9.4 270 top
TM10  500k  [TC33X]  112.01,85.6 0 top
TM11  500k  [TC33X]  179.07,61.72 0 top
TM12  500k  [TC33X]  241.55,85.6 0 top
TM13  500k  [TC33X]  164.34,58.67 90 top
TM14  500k  [TC33X]  227.84,52.07 270 top
TM15  500k  [TC33X]  192.79,85.6 0 top
TM16  500k  [TC33X]  226.31,36.83 270 top
TM17  500k  [TC33X]  209.04,86.11 0 top
TM18  500k  [TC33X]  227.33,23.11 270 top
TM19  500k  [TC33X]  226.31,85.6 0 top
TM20  500k  [TC33X]  225.81,9.4 270 top
TM21  500k  [TC33X]  308.36,61.72 0 top
TM22  500k  [TC33X]  370.84,85.6 0 top
TM23  500k  [TC33X]  293.62,58.67 90 top
TM24  500k  [TC33X]  357.12,52.07 270 top
TM25  500k  [TC33X]  322.07,85.6 0 top
TM26  500k  [TC33X]  355.6,36.83 270 top
TM27  500k  [TC33X]  338.33,86.11 0 top
TM28  500k  [TC33X]  356.62,23.11 270 top
TM29  500k  [TC33X]  355.6,85.6 0 top
TM30  500k  [TC33X]  355.09,9.4 270 top
U1  MAX31855KASA+  [21-0041B_8]  12.7,27.18 270 top
U2  MAX31855KASA+  [21-0041B_8]  22.1,27.18 270 top
U3  MAX31855KASA+  [21-0041B_8]  30.73,27.3 270 top
U4  MAX31855KASA+  [21-0041B_8]  39.37,27.18 270 top
U5  MAX31855KASA+  [21-0041B_8]  142.24,27.18 270 top
U6  MAX31855KASA+  [21-0041B_8]  151.64,27.18 270 top
U7  MAX31855KASA+  [21-0041B_8]  160.27,27.3 270 top
U8  MAX31855KASA+  [21-0041B_8]  168.91,27.18 270 top
U9  MAX31855KASA+  [21-0041B_8]  271.53,27.18 270 top
U10  MAX31855KASA+  [21-0041B_8]  280.92,27.18 270 top
U11  MAX31855KASA+  [21-0041B_8]  289.56,27.3 270 top
U12  MAX31855KASA+  [21-0041B_8]  298.2,27.18 270 top
U$1  TEENSY_3.2_SIMPLE  [TEENSY_3.2_SIMPLE]  71.12,1.78 90 top
U$2  MCP2551  [SOIC-08]  48.26,9.4 0 top
U$3  MCP6002SOIC  [SOIC-08]  74.93,10.67 270 top
U$4  CONNECTOR-22  [AUTOSPORT_12-35]  49.28,48.26 0 top
U$5  LTC6081  [MSOP-8_MS]  42.16,63.75 90 top
U$6  LTC6081  [MSOP-8_MS]  33.27,51.31 180 top
U$7  TEENSY_3.2_SIMPLE  [TEENSY_3.2_SIMPLE]  200.66,1.78 90 top
U$8  LTC6081  [MSOP-8_MS]  98.3,59.94 0 top
U$9  LTC6081  [MSOP-8_MS]  55.88,86.61 90 top
U$10  LTC6081  [MSOP-8_MS]  97.79,44.2 0 top
U$11  LTC6081  [MSOP-8_MS]  71.63,86.61 90 top
U$12  LTC6081  [MSOP-8_MS]  98.81,29.97 0 top
U$13  LTC6081  [MSOP-8_MS]  88.9,86.11 90 top
U$14  LTC6081  [MSOP-8_MS]  98.81,16.26 0 top
U$15  LTC6081  [MSOP-8_MS]  104.65,85.6 90 top
U$16  LTC6081  [MSOP-8_MS]  227.33,44.2 0 top
U$17  LTC6081  [MSOP-8_MS]  201.17,86.61 90 top
U$18  LTC6081  [MSOP-8_MS]  228.35,29.97 0 top
U$19  LTC6081  [MSOP-8_MS]  218.44,86.11 90 top
U$20  LTC6081  [MSOP-8_MS]  228.35,16.26 0 top
U$21  LTC6081  [MSOP-8_MS]  234.19,85.6 90 top
U$22  MCP2551  [SOIC-08]  177.8,9.4 0 top
U$23  MCP6002SOIC  [SOIC-08]  204.47,10.67 270 top
U$24  LTC6081  [MSOP-8_MS]  171.7,63.75 90 top
U$25  LTC6081  [MSOP-8_MS]  162.81,51.31 180 top
U$26  LTC6081  [MSOP-8_MS]  227.84,59.94 0 top
U$27  LTC6081  [MSOP-8_MS]  185.42,86.61 90 top
U$28  CONNECTOR-22  [AUTOSPORT_12-35]  178.82,48.26 0 top
U$29  TEENSY_3.2_SIMPLE  [TEENSY_3.2_SIMPLE]  329.95,1.78 90 top
U$30  LTC6081  [MSOP-8_MS]  356.62,44.2 0 top
U$31  LTC6081  [MSOP-8_MS]  330.45,86.61 90 top
U$32  LTC6081  [MSOP-8_MS]  357.63,29.97 0 top
U$33  LTC6081  [MSOP-8_MS]  347.73,86.11 90 top
U$34  LTC6081  [MSOP-8_MS]  357.63,16.26 0 top
U$35  LTC6081  [MSOP-8_MS]  363.47,85.6 90 top
U$36  MCP2551  [SOIC-08]  307.09,9.4 0 top
U$37  MCP6002SOIC  [SOIC-08]  333.76,10.67 270 top
U$38  LTC6081  [MSOP-8_MS]  300.99,63.75 90 top
U$39  LTC6081  [MSOP-8_MS]  292.1,51.31 180 top
U$40  LTC6081  [MSOP-8_MS]  357.12,59.94 0 top
U$41  LTC6081  [MSOP-8_MS]  314.71,86.61 90 top
U$42  CONNECTOR-22  [AUTOSPORT_12-35]  308.1,48.26 0 top

## Library data of the parts
C1-C198 J1-J96 LT1790B LT1790B1-LT1790B29 R1-R285 REG REG1 REG2 TM1-TM30 U$1-U$42 = HyTechDevices
U1-U12 = HyTechDevices; MANUFACTURER_PART_NUMBER: MAX31855KASA+; VENDOR: Maxim Integrated Products

## Nets
+3V1: C21.1 C35.1 C36.1 C51.1 C65.1 C77.2 C80.2 C81.1 C82.1 C83.2 C87.1 C89.1 C90.1 C91.2 C95.2 C96.1 C97.1 C98.2 C101.1 C103.1 C104.1 C105.2 C106.2 C109.2 C110.1 C111.1 C112.2 C116.1 C118.1 C119.1 C120.2 C124.2 C125.1 C126.1 C127.2 C130.1 C131.1 C132.2 J19.2 J44.2 J50.2 J62.2 R19.1 R79.2 R105.2 R115.2 R119.1 R126.2 R136.2 R139.1 R147.2 R157.2 R160.1 R168.2 R178.2 R181.1 R189.2 U5.4 U6.4 U7.4 U8.4 U$7.3.3V U$16.8 U$17.8 U$18.8 U$19.8 U$20.8 U$21.8 U$23.8 U$24.8 U$25.8 U$26.8 U$27.8 U$28.P$15
+3V2: C136.1 C137.1 C138.1 C140.1 C141.1 C143.2 C146.2 C147.1 C148.1 C149.2 C153.1 C155.1 C156.1 C157.2 C161.2 C162.1 C163.1 C164.2 C167.1 C169.1 C170.1 C171.2 C172.2 C175.2 C176.1 C177.1 C178.2 C182.1 C184.1 C185.1 C186.2 C190.2 C191.1 C192.1 C193.2 C196.1 C197.1 C198.2 J69.2 J76.2 J82.2 J94.2 R191.1 R193.2 R200.2 R210.2 R214.1 R221.2 R231.2 R234.1 R242.2 R252.2 R255.1 R263.2 R273.2 R276.1 R284.2 U9.4 U10.4 U11.4 U12.4 U$29.3.3V U$30.8 U$31.8 U$32.8 U$33.8 U$34.8 U$35.8 U$37.8 U$38.8 U$39.8 U$40.8 U$41.8 U$42.P$15
+3V3: C5.2 C8.1 C9.2 C12.1 C13.1 C14.1 C18.1 C19.1 C22.2 C25.2 C26.1 C27.1 C28.2 C31.1 C33.1 C34.1 C37.2 C40.2 C41.1 C42.1 C43.2 C46.1 C48.1 C49.1 C52.2 C55.2 C56.1 C57.1 C58.2 C61.1 C63.1 C64.1 C67.2 C70.2 C71.1 C72.1 C73.2 C76.1 J7.2 J15.2 J23.2 J31.2 R1.1 R11.2 R18.2 R28.2 R31.1 R38.2 R48.2 R50.1 R58.2 R68.2 R70.1 R78.2 R88.2 R90.1 R98.2 U1.4 U2.4 U3.4 U4.4 U$1.3.3V U$3.8 U$4.P$15 U$5.8 U$6.8 U$8.8 U$9.8 U$10.8 U$11.8 U$12.8 U$13.8 U$14.8 U$15.8
+5V: C1.2 C2.2 C4.2 REG.3 U$1.VIN U$2.3
+5V1: C15.2 C66.2 C94.2 REG1.3 U$7.VIN U$22.3
+5V2: C133.2 C142.2 C160.2 REG2.3 U$29.VIN U$36.3
+12V: C3.2 REG.1 U$4.P$14 U$4.P$17 U$4.P$19
+12V1: C85.2 REG1.1 U$28.P$14 U$28.P$17 U$28.P$19
+12V2: C151.2 REG2.1 U$42.P$14 U$42.P$17 U$42.P$19
CANH: R39.1 U$2.7 U$4.P$21
CANH1: R190.1 U$22.7 U$28.P$21
CANH2: R285.1 U$36.7 U$42.P$21
CANL: R39.2 U$2.6 U$4.P$20
CANL1: R190.2 U$22.6 U$28.P$20
CANL2: R285.2 U$36.6 U$42.P$20
CS1: U1.6 U$1.D7(RX3)
CS2: U2.6 U$1.D8(TX3)
CS3: U3.6 U$1.D9(RX2)
CS4: U4.6 U$1.D10(TX2)
CS5: U6.6 U$7.D8(TX3)
CS6: U5.6 U$7.D7(RX3)
CS7: U7.6 U$7.D9(RX2)
CS8: U8.6 U$7.D10(TX2)
CS9: U10.6 U$29.D8(TX3)
CS10: U9.6 U$29.D7(RX3)
CS11: U11.6 U$29.D9(RX2)
CS12: U12.6 U$29.D10(TX2)
GND: C1.1 C2.1 C3.1 C4.1 C5.1 C7.1 C8.2 C9.1 C11.1 C12.2 C13.2 C14.2 C18.2 C19.2 C22.1 C24.1 C25.1 C26.2 C27.2 C28.1 C30.1 C31.2 C33.2 C34.2 C37.1 C39.1 C40.1 C41.2 C42.2 C43.1 C45.1 C46.2 C48.2 C49.2 C52.1 C54.1 C55.1 C56.2 C57.2 C58.1 C60.1 C61.2 C63.2 C64.2 C67.1 C69.1 C70.1 C71.2 C72.2 C73.1 C75.1 C76.2 LT1790B1.A LT1790B2.A LT1790B3.A LT1790B4.A LT1790B5.A LT1790B6.A LT1790B7.A LT1790B8.A LT1790B9.A LT1790B.A R2.2 R3.2 R4.1 R30.2 R32.1 R49.2 R51.1 R69.2 R71.1 R89.2 R91.1 REG.2 U1.1 U2.1 U3.1 U4.1 U$1.GND U$2.2 U$2.8 U$3.4 U$4.P$2 U$4.P$3 U$5.4 U$6.4 U$8.4 U$9.4 U$10.4 U$11.4 U$12.4 U$13.4 U$14.4 U$15.4
GND1: C15.1 C20.1 C21.2 C35.2 C36.2 C51.2 C65.2 C66.1 C77.1 C79.1 C80.1 C81.2 C82.2 C83.1 C85.1 C86.1 C87.2 C89.2 C90.2 C91.1 C93.1 C94.1 C95.1 C96.2 C97.2 C98.1 C100.1 C101.2 C103.2 C104.2 C105.1 C106.1 C108.1 C109.1 C110.2 C111.2 C112.1 C115.1 C116.2 C118.2 C119.2 C120.1 C122.1 C123.1 C124.1 C125.2 C126.2 C127.1 C129.1 C130.2 C131.2 C132.1 LT1790B10.A LT1790B11.A LT1790B12.A LT1790B13.A LT1790B14.A LT1790B15.A LT1790B16.A LT1790B17.A LT1790B18.A LT1790B19.A R106.2 R117.2 R118.2 R120.1 R127.1 R137.2 R140.1 R158.2 R161.1 R179.2 R182.1 REG1.2 U5.1 U6.1 U7.1 U8.1 U$7.GND U$16.4 U$17.4 U$18.4 U$19.4 U$20.4 U$21.4 U$22.2 U$22.8 U$23.4 U$24.4 U$25.4 U$26.4 U$27.4 U$28.P$2 U$28.P$3
GND2: C133.1 C135.1 C136.2 C137.2 C138.2 C140.2 C141.2 C142.1 C143.1 C145.1 C146.1 C147.2 C148.2 C149.1 C151.1 C152.1 C153.2 C155.2 C156.2 C157.1 C159.1 C160.1 C161.1 C162.2 C163.2 C164.1 C166.1 C167.2 C169.2 C170.2 C171.1 C172.1 C174.1 C175.1 C176.2 C177.2 C178.1 C181.1 C182.2 C184.2 C185.2 C186.1 C188.1 C189.1 C190.1 C191.2 C192.2 C193.1 C195.1 C196.2 C197.2 C198.1 LT1790B20.A LT1790B21.A LT1790B22.A LT1790B23.A LT1790B24.A LT1790B25.A LT1790B26.A LT1790B27.A LT1790B28.A LT1790B29.A R201.2 R212.2 R213.2 R215.1 R222.1 R232.2 R235.1 R253.2 R256.1 R274.2 R277.1 REG2.2 U9.1 U10.1 U11.1 U12.1 U$29.GND U$30.4 U$31.4 U$32.4 U$33.4 U$34.4 U$35.4 U$36.2 U$36.8 U$37.4 U$38.4 U$39.4 U$40.4 U$41.4 U$42.P$2 U$42.P$3
INB-: C6.1 R9.1 R10.2 U$5.6
INB-1: C10.1 R16.1 R17.2 U$6.6
INB-2: C23.1 R26.1 R27.2 U$8.6
INB-3: C29.1 R36.1 R37.2 U$9.6
INB-4: C38.1 R46.1 R47.2 U$10.6
INB-5: C44.1 R56.1 R57.2 U$11.6
INB-6: C53.1 R66.1 R67.2 U$12.6
INB-7: C59.1 R76.1 R77.2 U$13.6
INB-8: C68.1 R86.1 R87.2 U$14.6
INB-9: C74.1 R96.1 R97.2 U$15.6
INB-10: C114.1 R59.2 R180.1 U$24.6
INB-11: C16.1 R103.1 R104.2 U$25.6
INB-12: C78.1 R113.1 R114.2 U$26.6
INB-13: C84.1 R124.1 R125.2 U$27.6
INB-14: C92.1 R134.1 R135.2 U$16.6
INB-15: C99.1 R145.1 R146.2 U$17.6
INB-16: C107.1 R155.1 R156.2 U$18.6
INB-17: C113.1 R166.1 R167.2 U$19.6
INB-18: C121.1 R176.1 R177.2 U$20.6
INB-19: C128.1 R187.1 R188.2 U$21.6
INB-20: C180.1 R192.2 R275.1 U$38.6
INB-21: C134.1 R198.1 R199.2 U$39.6
INB-22: C144.1 R208.1 R209.2 U$40.6
INB-23: C150.1 R219.1 R220.2 U$41.6
INB-24: C158.1 R229.1 R230.2 U$30.6
INB-25: C165.1 R240.1 R241.2 U$31.6
INB-26: C173.1 R250.1 R251.2 U$32.6
INB-27: C179.1 R261.1 R262.2 U$33.6
INB-28: C187.1 R271.1 R272.2 U$34.6
INB-29: C194.1 R282.1 R283.2 U$35.6
MISO: U1.7 U2.7 U3.7 U4.7 U$1.D12
MISO1: U5.7 U6.7 U7.7 U8.7 U$7.D12
MISO2: U9.7 U10.7 U11.7 U12.7 U$29.D12
N$1: U$1.D4(CANRX) U$2.4
N$2: C17.1 R20.2 U1.2
N$3: U$1.D3(CANTX) U$2.1
N$4: R1.2 R2.1 U$3.2 U$3.6
N$5: R5.2 R8.2 U$5.2
N$6: C17.2 R21.2 U1.3
N$7: J2.2 R21.1
N$8: R6.2 R7.1 U$5.3
N$9: C7.2 LT1790B.C R10.1 R11.1 TM1.2
N$10: R7.2 TM1.1
N$11: R12.2 R15.2 U$6.2
N$12: R13.2 R14.1 U$6.3
N$13: C11.2 LT1790B1.C R17.1 R18.1 TM2.2
N$14: R14.2 TM2.1
N$15: J1.2 R20.1
N$16: R22.2 R25.2 U$8.2
N$17: R23.2 R24.1 U$8.3
N$18: C24.2 LT1790B2.C R27.1 R28.1 TM3.2
N$19: R24.2 TM3.1
N$20: U$7.D4(CANRX) U$22.4
N$21: J6.2 R22.1
N$22: R31.2 R32.2 R33.1
N$23: J8.2 R29.1 R30.1
N$24: C32.1 R40.2 U2.2
N$25: J5.2 R23.1
N$26: R29.2 R35.2 U$9.2
N$27: R33.2 R34.1 U$9.3
N$28: C30.2 LT1790B3.C R37.1 R38.1 TM4.2
N$29: R34.2 TM4.1
N$30: C32.2 R41.2 U2.3
N$31: J10.2 R41.1
N$32: J9.2 R40.1
N$33: R42.2 R45.2 U$10.2
N$34: R43.2 R44.1 U$10.3
N$35: C39.2 LT1790B4.C R47.1 R48.1 TM5.2
N$36: R44.2 TM5.1
N$37: R50.2 R51.2 R53.1
N$38: J16.2 R49.1 R52.1
N$39: J14.2 R42.1
N$40: J13.2 R43.1
N$41: R52.2 R55.2 U$11.2
N$42: R53.2 R54.1 U$11.3
N$43: C45.2 LT1790B5.C R57.1 R58.1 TM6.2
N$44: R54.2 TM6.1
N$45: C47.1 R60.2 U3.2
N$46: C47.2 R61.2 U3.3
N$47: J18.2 R61.1
N$48: J17.2 R60.1
N$49: R62.2 R65.2 U$12.2
N$50: R63.2 R64.1 U$12.3
N$51: C54.2 LT1790B6.C R67.1 R68.1 TM7.2
N$52: R64.2 TM7.1
N$53: R70.2 R71.2 R73.1
N$54: J24.2 R69.1 R72.1
N$55: J22.2 R62.1
N$56: J21.2 R63.1
N$57: R72.2 R75.2 U$13.2
N$58: R73.2 R74.1 U$13.3
N$59: C60.2 LT1790B7.C R77.1 R78.1 TM8.2
N$60: R74.2 TM8.1
N$61: C62.1 R80.2 U4.2
N$62: C62.2 R81.2 U4.3
N$63: J26.2 R81.1
N$64: J25.2 R80.1
N$65: R82.2 R85.2 U$14.2
N$66: R83.2 R84.1 U$14.3
N$67: C69.2 LT1790B8.C R87.1 R88.1 TM9.2
N$68: R84.2 TM9.1
N$69: R90.2 R91.2 R93.1
N$70: J32.2 R89.1 R92.1
N$71: J30.2 R82.1
N$72: J29.2 R83.1
N$73: R92.2 R95.2 U$15.2
N$74: R93.2 R94.1 U$15.3
N$75: C75.2 LT1790B9.C R97.1 R98.1 TM10.2
N$76: R94.2 TM10.1
N$77: U$7.D3(CANTX) U$22.1
N$78: R19.2 R106.1 U$23.2 U$23.6
N$79: R138.2 R169.2 U$24.2
N$80: R148.2 R159.1 U$24.3
N$81: C123.2 LT1790B10.C R59.1 R79.1 TM11.2
N$82: R159.2 TM11.1
N$83: R99.2 R102.2 U$25.2
N$84: R100.2 R101.1 U$25.3
N$85: C20.2 LT1790B11.C R104.1 R105.1 TM13.2
N$86: R101.2 TM13.1
N$87: C50.1 R107.2 U5.2
N$88: C50.2 R108.2 U5.3
N$89: J33.2 R108.1
N$90: J3.2 R107.1
N$91: R109.2 R112.2 U$26.2
N$92: R110.2 R111.1 U$26.3
N$93: C79.2 LT1790B12.C R114.1 R115.1 TM14.2
N$94: R111.2 TM14.1
N$95: R119.2 R120.2 R121.1
N$96: J63.2 R116.1 R118.1
N$97: J61.2 R109.1
N$98: J60.2 R110.1
N$99: R116.2 R123.2 U$27.2
N$100: R121.2 R122.1 U$27.3
N$101: C86.2 LT1790B13.C R125.1 R126.1 TM15.2
N$102: R122.2 TM15.1
N$103: C88.1 R128.2 U6.2
N$104: C88.2 R129.2 U6.3
N$105: J4.2 R129.1
N$106: J64.2 R128.1
N$107: R130.2 R133.2 U$16.2
N$108: R131.2 R132.1 U$16.3
N$109: C93.2 LT1790B14.C R135.1 R136.1 TM16.2
N$110: R132.2 TM16.1
N$111: R139.2 R140.2 R142.1
N$112: J20.2 R137.1 R141.1
N$113: J12.2 R130.1
N$114: J11.2 R131.1
N$115: R141.2 R144.2 U$17.2
N$116: R142.2 R143.1 U$17.3
N$117: C100.2 LT1790B15.C R146.1 R147.1 TM17.2
N$118: R143.2 TM17.1
N$119: C102.1 R149.2 U7.2
N$120: C102.2 R150.2 U7.3
N$121: J28.2 R150.1
N$122: J27.2 R149.1
N$123: R151.2 R154.2 U$18.2
N$124: R152.2 R153.1 U$18.3
N$125: C108.2 LT1790B16.C R156.1 R157.1 TM18.2
N$126: R153.2 TM18.1
N$127: R160.2 R161.2 R163.1
N$128: J45.2 R158.1 R162.1
N$129: J39.2 R151.1
N$130: J36.2 R152.1
N$131: R162.2 R165.2 U$19.2
N$132: R163.2 R164.1 U$19.3
N$133: C115.2 LT1790B17.C R167.1 R168.1 TM19.2
N$134: R164.2 TM19.1
N$135: C117.1 R170.2 U8.2
N$136: C117.2 R171.2 U8.3
N$137: J47.2 R171.1
N$138: J46.2 R170.1
N$139: R172.2 R175.2 U$20.2
N$140: R173.2 R174.1 U$20.3
N$141: C122.2 LT1790B18.C R177.1 R178.1 TM20.2
N$142: R174.2 TM20.1
N$143: R181.2 R182.2 R184.1
N$144: J51.2 R179.1 R183.1
N$145: J49.2 R172.1
N$146: J48.2 R173.1
N$147: R183.2 R186.2 U$21.2
N$148: R184.2 R185.1 U$21.3
N$149: C129.2 LT1790B19.C R188.1 R189.1 TM12.2
N$150: R185.2 TM12.1
N$151: U$29.D4(CANRX) U$36.4
N$152: U$29.D3(CANTX) U$36.1
N$153: R191.2 R201.1 U$37.2 U$37.6
N$154: R233.2 R264.2 U$38.2
N$155: R243.2 R254.1 U$38.3
N$156: C189.2 LT1790B20.C R192.1 R193.1 TM21.2
N$157: R254.2 TM21.1
N$158: R194.2 R197.2 U$39.2
N$159: R195.2 R196.1 U$39.3
N$160: C135.2 LT1790B21.C R199.1 R200.1 TM23.2
N$161: R196.2 TM23.1
N$162: C139.1 R202.2 U9.2
N$163: C139.2 R203.2 U9.3
N$164: J73.2 R203.1
N$165: J65.2 R202.1
N$166: R204.2 R207.2 U$40.2
N$167: R205.2 R206.1 U$40.3
N$168: C145.2 LT1790B22.C R209.1 R210.1 TM24.2
N$169: R206.2 TM24.1
N$170: R214.2 R215.2 R216.1
N$171: J95.2 R211.1 R213.1
N$172: J93.2 R204.1
N$173: J92.2 R205.1
N$174: R211.2 R218.2 U$41.2
N$175: R216.2 R217.1 U$41.3
N$176: C152.2 LT1790B23.C R220.1 R221.1 TM25.2
N$177: R217.2 TM25.1
N$178: C154.1 R223.2 U10.2
N$179: C154.2 R224.2 U10.3
N$180: J66.2 R224.1
N$181: J96.2 R223.1
N$182: R225.2 R228.2 U$30.2
N$183: R226.2 R227.1 U$30.3
N$184: C159.2 LT1790B24.C R230.1 R231.1 TM26.2
N$185: R227.2 TM26.1
N$186: R234.2 R235.2 R237.1
N$187: J70.2 R232.1 R236.1
N$188: J68.2 R225.1
N$189: J67.2 R226.1
N$190: R236.2 R239.2 U$31.2
N$191: R237.2 R238.1 U$31.3
N$192: C166.2 LT1790B25.C R241.1 R242.1 TM27.2
N$193: R238.2 TM27.1
N$194: C168.1 R244.2 U11.2
N$195: C168.2 R245.2 U11.3
N$196: J72.2 R245.1
N$197: J71.2 R244.1
N$198: R246.2 R249.2 U$32.2
N$199: R247.2 R248.1 U$32.3
N$200: C174.2 LT1790B26.C R251.1 R252.1 TM28.2
N$201: R248.2 TM28.1
N$202: R255.2 R256.2 R258.1
N$203: J77.2 R253.1 R257.1
N$204: J75.2 R246.1
N$205: J74.2 R247.1
N$206: R257.2 R260.2 U$33.2
N$207: R258.2 R259.1 U$33.3
N$208: C181.2 LT1790B27.C R262.1 R263.1 TM29.2
N$209: R259.2 TM29.1
N$210: C183.1 R265.2 U12.2
N$211: C183.2 R266.2 U12.3
N$212: J79.2 R266.1
N$213: J78.2 R265.1
N$214: R267.2 R270.2 U$34.2
N$215: R268.2 R269.1 U$34.3
N$216: C188.2 LT1790B28.C R272.1 R273.1 TM30.2
N$217: R269.2 TM30.1
N$218: R276.2 R277.2 R279.1
N$219: J83.2 R274.1 R278.1
N$220: J81.2 R267.1
N$221: J80.2 R268.1
N$222: R278.2 R281.2 U$35.2
N$223: R279.2 R280.1 U$35.3
N$224: C195.2 LT1790B29.C R283.1 R284.1 TM22.2
N$225: R280.2 TM22.1
OUTA: R8.1 U$5.1 U$5.5
OUTA1: R169.1 U$24.1 U$24.5
OUTA2: R264.1 U$38.1 U$38.5
OUTB: R15.1 U$6.1 U$6.5
OUTB1: R102.1 U$25.1 U$25.5
OUTB2: R197.1 U$39.1 U$39.5
OUTC: R25.1 U$8.1 U$8.5
OUTC1: R112.1 U$26.1 U$26.5
OUTC2: R207.1 U$40.1 U$40.5
OUTD: R35.1 U$9.1 U$9.5
OUTD1: R123.1 U$27.1 U$27.5
OUTD2: R218.1 U$41.1 U$41.5
OUTE: R45.1 U$10.1 U$10.5
OUTE1: R133.1 U$16.1 U$16.5
OUTE2: R228.1 U$30.1 U$30.5
OUTF: R55.1 U$11.1 U$11.5
OUTF1: R144.1 U$17.1 U$17.5
OUTF2: R239.1 U$31.1 U$31.5
OUTG: R65.1 U$12.1 U$12.5
OUTG1: R154.1 U$18.1 U$18.5
OUTG2: R249.1 U$32.1 U$32.5
OUTH: R75.1 U$13.1 U$13.5
OUTH1: R165.1 U$19.1 U$19.5
OUTH2: R260.1 U$33.1 U$33.5
OUTI: R85.1 U$14.1 U$14.5
OUTI1: R175.1 U$20.1 U$20.5
OUTI2: R270.1 U$34.1 U$34.5
OUTJ: R95.1 U$15.1 U$15.5
OUTJ1: R186.1 U$21.1 U$21.5
OUTJ2: R281.1 U$35.1 U$35.5
SCK: U1.5 U2.5 U3.5 U4.5 U$1.D13
SCK1: U5.5 U6.5 U7.5 U8.5 U$7.D13
SCK2: U9.5 U10.5 U11.5 U12.5 U$29.D13
SG1_V+: R5.1 U$4.P$13
SG1_V+1: R138.1 U$28.P$13
SG1_V+2: R233.1 U$42.P$13
SG1_V-: R6.1 U$4.P$1
SG1_V-1: R148.1 U$28.P$1
SG1_V-2: R243.1 U$42.P$1
SG1_VOUT: C6.2 R9.2 U$1.A8 U$5.7
SG1_VOUT1: C114.2 R180.2 U$7.A8 U$24.7
SG1_VOUT2: C180.2 R275.2 U$29.A8 U$38.7
SG2-VOUT: U$1.A9
SG2-VOUT1: U$7.A9
SG2-VOUT2: U$29.A9
SG2_V+: R12.1 U$4.P$22
SG2_V+1: R99.1 U$28.P$22
SG2_V+2: R194.1 U$42.P$22
SG2_V-: R13.1 U$4.P$12
SG2_V-1: R100.1 U$28.P$12
SG2_V-2: R195.1 U$42.P$12
SG2_VOUT: C10.2 R16.2 U$6.7
SG2_VOUT1: C16.2 R103.2 U$25.7
SG2_VOUT2: C134.2 R198.2 U$39.7
SNR1: J34.2 J35.2 U$1.A5
SNR1-SG-VOUT: C29.2 J35.1 R36.2 U$9.7
SNR1-SG-VOUT1: C84.2 J53.1 R124.2 U$27.7
SNR1-SG-VOUT2: C150.2 J85.1 R219.2 U$41.7
SNR1-WB-VOUT: C23.2 J34.1 R26.2 U$8.7
SNR1-WB-VOUT1: C78.2 J52.1 R113.2 U$26.7
SNR1-WB-VOUT2: C144.2 J84.1 R208.2 U$40.7
SNR2: J42.2 J43.2 U$1.A4
SNR2-SG-VOUT: C44.2 J42.1 R56.2 U$11.7
SNR2-SG-VOUT1: C99.2 J58.1 R145.2 U$17.7
SNR2-SG-VOUT2: C165.2 J90.1 R240.2 U$31.7
SNR2-WB-VOUT: C38.2 J43.1 R46.2 U$10.7
SNR2-WB-VOUT1: C92.2 J59.1 R134.2 U$16.7
SNR2-WB-VOUT2: C158.2 J91.1 R229.2 U$30.7
SNR3: J37.2 J38.2 U$1.A3
SNR3-SG-VOUT: C59.2 J38.1 R76.2 U$13.7
SNR3-SG-VOUT1: C113.2 J55.1 R166.2 U$19.7
SNR3-SG-VOUT2: C179.2 J87.1 R261.2 U$33.7
SNR3-WB-VOUT: C53.2 J37.1 R66.2 U$12.7
SNR3-WB-VOUT1: C107.2 J54.1 R155.2 U$18.7
SNR3-WB-VOUT2: C173.2 J86.1 R250.2 U$32.7
SNR4: J40.2 J41.2 U$1.A2
SNR4-SG-VOUT: C74.2 J41.1 R96.2 U$15.7
SNR4-SG-VOUT1: C128.2 J57.1 R187.2 U$21.7
SNR4-SG-VOUT2: C194.2 J89.1 R282.2 U$35.7
SNR4-WB-VOUT: C68.2 J40.1 R86.2 U$14.7
SNR4-WB-VOUT1: C121.2 J56.1 R176.2 U$20.7
SNR4-WB-VOUT2: C187.2 J88.1 R271.2 U$34.7
SNR5: J52.2 J53.2 U$7.A5
SNR6: J58.2 J59.2 U$7.A4
SNR7: J54.2 J55.2 U$7.A3
SNR8: J56.2 J57.2 U$7.A2
SNR9: J84.2 J85.2 U$29.A5
SNR10: J90.2 J91.2 U$29.A4
SNR11: J86.2 J87.2 U$29.A3
SNR12: J88.2 J89.2 U$29.A2
SRN1-1: J2.1 J6.1 J8.1 U$4.P$4
SRN1-2: J1.1 J5.1 J7.1 U$4.P$5
SRN1-3: J3.1 J60.1 J62.1 U$28.P$5
SRN1-4: J33.1 J61.1 J63.1 U$28.P$4
SRN1-5: J65.1 J92.1 J94.1 U$42.P$5
SRN1-6: J73.1 J93.1 J95.1 U$42.P$4
SRN2-1: J10.1 J14.1 J16.1 U$4.P$6
SRN2-2: J9.1 J13.1 J15.1 U$4.P$7
SRN2-3: J11.1 J19.1 J64.1 U$28.P$7
SRN2-4: J4.1 J12.1 J20.1 U$28.P$6
SRN2-5: J67.1 J69.1 J96.1 U$42.P$7
SRN2-6: J66.1 J68.1 J70.1 U$42.P$6
SRN3-1: J18.1 J22.1 J24.1 U$4.P$8
SRN3-2: J17.1 J21.1 J23.1 U$4.P$9
SRN3-3: J27.1 J36.1 J44.1 U$28.P$9
SRN3-4: J28.1 J39.1 J45.1 U$28.P$8
SRN3-5: J71.1 J74.1 J76.1 U$42.P$9
SRN3-6: J72.1 J75.1 J77.1 U$42.P$8
SRN4-1: J26.1 J30.1 J32.1 U$4.P$10
SRN4-2: J25.1 J29.1 J31.1 U$4.P$11
SRN4-3: J46.1 J48.1 J50.1 U$28.P$11
SRN4-4: J47.1 J49.1 J51.1 U$28.P$10
SRN4-5: J78.1 J80.1 J82.1 U$42.P$11
SRN4-6: J79.1 J81.1 J83.1 U$42.P$10
WS1: U$1.D5 U$3.1
WS1_OUT: R3.1 U$3.3 U$4.P$18
WS1_OUT1: R117.1 U$23.3 U$28.P$18
WS1_OUT2: R212.1 U$37.3 U$42.P$18
WS2: U$1.D6 U$3.7
WS2_OUT: R4.2 U$3.5 U$4.P$16
WS2_OUT1: R127.2 U$23.5 U$28.P$16
WS2_OUT2: R222.2 U$37.5 U$42.P$16
WS3: U$7.D5 U$23.1
WS4: U$7.D6 U$23.7
WS5: U$29.D5 U$37.1
WS6: U$29.D6 U$37.7

## Tracks (layer width: path | path; a pad name or v marks a point on that pad's centre or on a via)
+3V1  (via drill 0.35)
  Top 0.254: U$7.3.3V 168.4,15.24 166.62,15.24 | 165.61,29.97 165.94,29.64 U8.4 | 165.61,29.97 v164.08,31.5 | 158.33,29.81 U7.4 158.33,29.81 | U5.4 139.01,29.64 v138.68,29.97 138.68,29.04 C65.1 C51.1 136.14,29.04 136.14,41.15 141.73,46.74 C105.2 C131.1 159,48.43 159,49.28 | 148.84,29.97 149.4,29.97 U6.4 | v148.34,32 148.34,30.48 148.84,29.97 | v156.97,32 156.97,31.17 158.33,29.81 | C90.1 C89.1 148.84,29.63 148.84,29.97 | C103.1 C104.1 158.33,29.72 158.33,29.81 | C118.1 C119.1 165.61,28.23 165.61,29.97 | R115.2 233.17,55.24 | 233.17,55.24 233.17,54.36 233.17,53.59 C91.2 C95.2 228.35,46.4 229.54,45.21 | 183.88,89.39 182.88,90.39 182.88,93.98 183.9,95 188.47,95 190.75,92.71 R126.2 193.52,88.18 193.65,88.18 193.68,88.15 C98.2 C101.1 199.62,89.39 199.63,89.39 | 183.88,89.39 U$27.8 | U$17.8 199.63,89.39 | 199.63,89.39 198.63,90.39 198.63,95.5 199.14,96.01 202.7,96.01 R147.2 208.53,92.21 212.59,88.15 C116.1 C112.2 215.66,88.15 216.64,89.14 | 216.64,89.14 214.88,90.9 214.88,93.47 216.41,95 220.47,95 223.27,92.2 R168.2 224.29,89.41 227.47,89.41 C130.1 C127.2 232.64,88.37 232.65,88.37 | 216.64,89.14 U$19.8 | 232.65,88.37 232.16,88.86 232.16,93.98 233.17,95 236.22,95 236.99,95 R189.2 243.84,88.15 243.84,76.2 240.28,72.64 | 232.65,88.37 U$21.8 | 170.73,66.55 170.73,68.07 170.73,72.09 170.69,72.14 171.2,72.64 174.75,72.64 | 174.75,72.64 174.75,68.67 R79.2 179.24,66.64 181.36,64.52 181.36,53.07 180.98,52.7 180.98,51.84 181.36,51.47 181.36,49.35 U$28.P$15 | U$25.8 159.55,49.28 159,49.28 | 159,49.28 154.94,49.28 154.43,49.78 154.43,52.83 158.5,56.9 R105.2 159.68,59.18 C132.2 C21.1 169.25,66.55 170.73,66.55